# EAGLE board m2201-stereo-input (EAGLE 7.5.0)
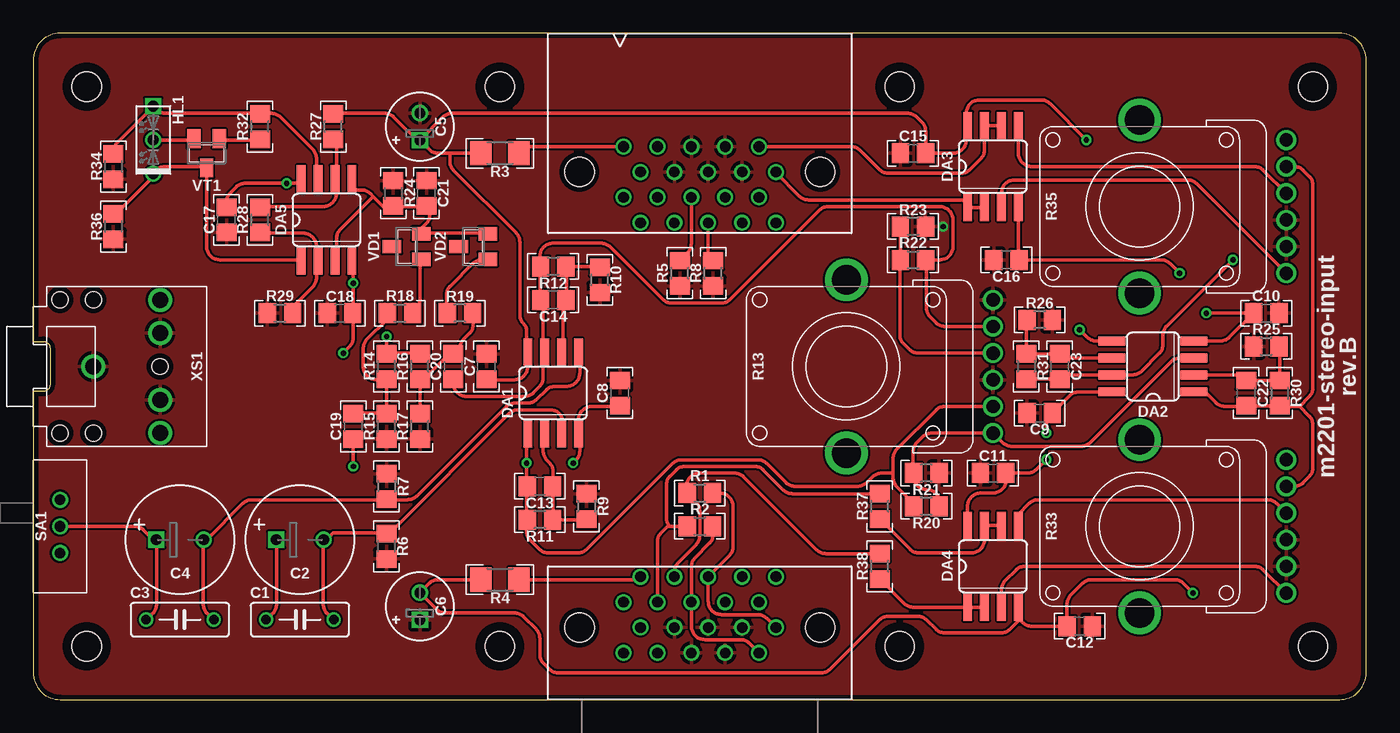
[diagram p0: board, top side]
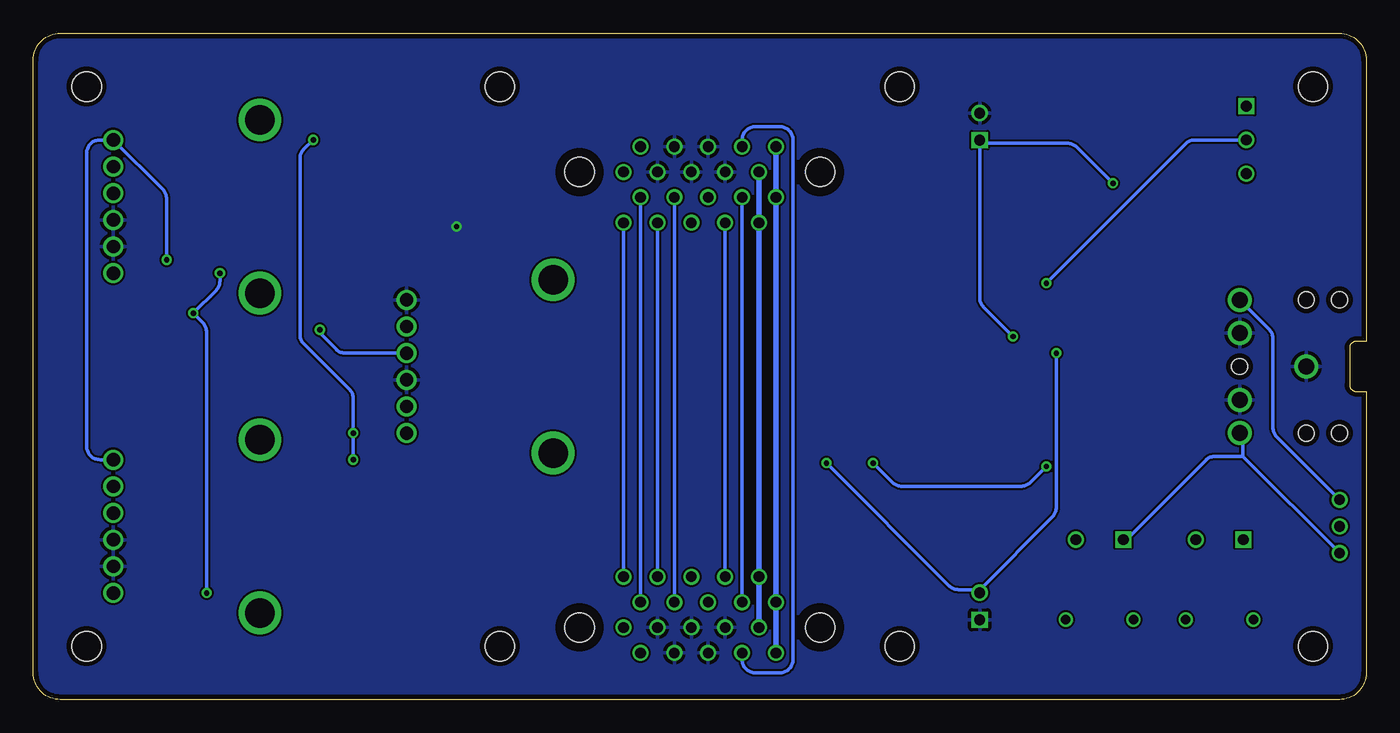
[diagram p1: board, bottom side, seen from below]

Size 100 x 50 mm. Coordinates in mm from the lower left corner, seen from the top.
Outline: 0,48 0,26.88 0.75,26.88 arc-90 1.25,26.38 1.25,23.62 arc-90 0.75,23.12 0,23.12 0,2 arc90 2,0 98,0 arc90 100,2 100,48 arc90 98,50 2,50 arc90 0,48
Copper layers (1*16): Top 0.0356mm / dielectric 1.5011mm / Bottom 0.0356mm
Design rules "LaenPCBOrder": minimum track width 6mil, minimum drill 13mil, track to track 6mil, track to pad 6mil, pad to pad 6mil, via to via 6mil, smd to smd 6mil, copper to edge 15mil, drill to drill 6mil, minimum pad ring 7mil, minimum via ring 7mil, stop-mask expansion 3mil, vias tented up to drill 0mil, thermal gap 10mil

## Footprints (pad centres in the part's own frame; a part is rotated, then mirrored left to right if it is on the bottom)
C050-025X075 = drill 0.7: 1 -2.54,0; 2 2.54,0
E3,5-8 = drill 0.813 square: + -1.778,0 | drill 0.813: - 1.778,0
E2-5 = drill 0.813 square: + -1.016,0 | drill 0.813: - 1.016,0
C-0805 = smd 1.3 x 1.5: 1 -0.95,0; 2 0.95,0
SO-8 = smd 0.66 x 2.032: 1 -1.905,-3.073; 2 -0.635,-3.073; 3 0.635,-3.073; 4 1.905,-3.073; 5 1.905,3.073; 6 0.635,3.073; 7 -0.635,3.073; 8 -1.905,3.073
LED2X5-3PIN = drill 0.813 square: A1 -2.54,0 | drill 0.813: A2 2.54,0; K 0,0
ST2-BOARD-50 = drill 0.8: A+15 44.285,7.31; A+15' 44.285,37.69; A-15 45.555,9.215; A-15' 45.555,35.785; ACV1 51.905,7.31; ACV1' 51.905,37.69; ACV2 53.175,9.215; ACV2' 53.175,35.785; ALFBK 49.365,7.31; ALFBK' 49.365,37.69; ALMIX 46.825,7.31; ALMIX' 46.825,37.69; ARFBK 50.635,9.215; ARFBK' 50.635,35.785; ARMIX 48.095,9.215; ARMIX' 48.095,35.785; ASMBCLK 55.715,9.215; ASMBCLK' 55.715,35.785; ASMBDAT 54.445,7.31; ASMBDAT' 54.445,37.69; B4 48.095,5.405; B4' 48.095,39.595; B5 49.365,3.5; B5' 49.365,41.5; B6 50.635,5.405; B6' 50.635,39.595; B7 51.905,3.5; B7' 51.905,41.5; B8 53.175,5.405; B8' 53.175,39.595; B+15 44.285,3.5; B+15' 44.285,41.5; B-15 45.555,5.405; B-15' 45.555,39.595; BINL 54.445,3.5; BINR 55.715,5.405; BOUTL' 54.445,41.5; BOUTR' 55.715,39.595; BSENSE 46.825,3.5; BSENSE' 46.825,41.5 | hole 2.2: 4,4; 4,46; 96,4; 96,46; 35,46; 65,46; 65,4; 35,4; 59.025,5.405; 40.975,5.405; 40.975,39.595; 59.025,39.595
R-0805 = smd 1.3 x 1.5: 1 -0.95,0; 2 0.95,0
R-1206 = smd 1.6 x 1.803: 1 -1.422,0; 2 1.422,0
RV11-DUAL = drill 1: 1 -1,-11; 1' -3,-11; 2 1,-11; 2' -5,-11; 3 3,-11; 3' 5,-11 | drill 2.2: S1 -6.5,0; S2 6.5,0
APEM-MJS12R = drill 0.8: C 0,-2; NC 2,-2; NO -2,-2
SOT23 = smd 1 x 1.4: 1 -0.95,-1.1; 2 0.95,-1.1; 3 0,1.1
35RAP = drill 1.2: 1 4.5,0; 2 9.5,-5; 3 9.5,5; 10 9.5,-2.5; 11 9.5,2.5 | hole 1.2: 2,5; 2,-5; 4.5,5; 4.5,-5; 9.5,0

## Placement (x,y rotation side)
C1  100N(FILM)  [C050-025X075]  20,6 0 top
C2  47U/35V  [E3,5-8]  20,12 0 top
C3  100N(FILM)  [C050-025X075]  11,6 0 top
C4  47U/35V  [E3,5-8]  11,12 0 top
C5  10U/35V  [E2-5]  29,43 90 top
C6  10U/35V  [E2-5]  29,7 90 top
C7  100N  [C-0805]  34,25 270 top
C8  100N  [C-0805]  44,23 90 top
C9  100N  [C-0805]  75.5,21.5 0 top
C10  100N  [C-0805]  92.5,29 0 top
C11  100N  [C-0805]  72,17 0 top
C12  100N  [C-0805]  78.5,5.5 0 top
C13  22P  [C-0805]  38,16 180 top
C14  22P  [C-0805]  39,30 180 top
C15  100N  [C-0805]  66,41 0 top
C16  100N  [C-0805]  73,33 180 top
C17  100N  [C-0805]  14.5,36 90 top
C18  100N  [C-0805]  23,29 180 top
C19  100N  [C-0805]  24,20.5 90 top
C20  100N  [C-0805]  31.5,25 90 top
C21  100N  [C-0805]  29.5,38 270 top
C22  22P  [C-0805]  91,23 270 top
C23  22P  [C-0805]  77,25 270 top
DA1  NJM2068M  [SO-8]  39,23 0 top
DA2  NJM2068M  [SO-8]  84,25 90 top
DA3  NJM5532M  [SO-8]  72,40 0 top
DA4  NJM5532M  [SO-8]  72,10 0 top
DA5  LM2903M  [SO-8]  22,36 0 top
HL1  RED/BLUE(2MMX5MM,CC)  [LED2X5-3PIN]  9,42 270 top
O1  [EMPTY]  -39.37,99.06 0 top  (outside the outline)
O2  450-AA150(15MM,D,BLACK)  [EMPTY]  -41.91,99.06 0 top  (outside the outline)
O3  450-CP155(15MM,GRAY/WHITE)  [EMPTY]  -54.61,99.06 0 top  (outside the outline)
O4  450-AA150(15MM,D,BLACK)  [EMPTY]  -44.45,99.06 0 top  (outside the outline)
O5  450-CP156(15MM,BLACK/WHITE)  [EMPTY]  -49.53,99.06 0 top  (outside the outline)
O6  450-AA150(15MM,D,BLACK)  [EMPTY]  -46.99,99.06 0 top  (outside the outline)
O7  450-CP156(15MM,BLACK/WHITE)  [EMPTY]  -52.07,99.06 0 top  (outside the outline)
PCB1  rev.B  [ST2-BOARD-50]  0,0 0 top
R1  10K  [R-0805]  50,15.5 0 top
R2  10K  [R-0805]  50,13 0 top
R3  10R(1206)  [R-1206]  35,41 180 top
R4  10R(1206)  [R-1206]  35,9 180 top
R5  100K  [R-0805]  48.5,32 90 top
R6  100K  [R-0805]  26.5,11.5 90 top
R7  100K  [R-0805]  26.5,16 270 top
R8  100K  [R-0805]  51,32 90 top
R9  10K  [R-0805]  41.5,14.5 270 top
R10  10K  [R-0805]  42.5,31.5 90 top
R11  10K  [R-0805]  38,13.5 180 top
R12  10K  [R-0805]  39,32.5 180 top
R13  2*B20K(CD)  [RV11-DUAL]  61,25 90 top
R14  10M  [R-0805]  26.5,25 90 top
R15  100K  [R-0805]  26.5,20.5 90 top
R16  10M  [R-0805]  29,25 90 top
R17  100K  [R-0805]  29,20.5 90 top
R18  47K  [R-0805]  27.5,29 0 top
R19  47K  [R-0805]  32,29 180 top
R20  9K1  [R-0805]  67,14.5 180 top
R21  9K1  [R-0805]  67,17 180 top
R22  9K1  [R-0805]  66,33 0 top
R23  9K1  [R-0805]  66,35.5 180 top
R24  330K  [R-0805]  27,38 270 top
R25  10K  [R-0805]  92.5,26.5 0 top
R26  10K  [R-0805]  75.5,28.5 180 top
R27  22K  [R-0805]  22.5,43 90 top
R28  4K7  [R-0805]  17,36 90 top
R29  100R  [R-0805]  18.5,29 0 top
R30  33K  [R-0805]  93.5,23 270 top
R31  33K  [R-0805]  74.5,25 270 top
R32  10K  [R-0805]  17,43 90 top
R33  2*A10K  [RV11-DUAL]  83,13 90 top
R34  2K2  [R-0805]  6,40 270 top
R35  2*A10K  [RV11-DUAL]  83,37 90 top
R36  1K8  [R-0805]  6,35.5 270 top
R37  10K  [R-0805]  63.5,14.5 90 top
R38  10K  [R-0805]  63.5,10 90 top
SA1  MJS12R  [APEM-MJS12R]  0,13 90 top
U1  FX2-20P-1.27DS  [EMPTY]  -60,-7 0 top  (outside the outline)
U2  FX2-20S-1.27DS  [EMPTY]  -61,-9 0 top  (outside the outline)
U3  ERM1-5MM  [EMPTY]  -57.15,99.06 0 top  (outside the outline)
VD1  BAS16  [SOT23]  28,34 90 top
VD2  BAS16  [SOT23]  33,34 90 top
VT1  BC848  [SOT23]  13,41 180 top
XS1  35RAPC4BHN2  [35RAP]  0,25 0 top

## Library data of the parts
C1 C3 = capacitors; MOUSER: 505-MKS2.1/63/5
C2 C4 = capacitors-electrolytic; MOUSER: 647-USP1E470MDD
C5 C6 = capacitors-electrolytic; MOUSER: 647-USW1V100MDD
C7-C12 C15-C21 = capacitors; MOUSER: 77-VJ0805V104MXBPBC
C13 C14 C22 C23 = capacitors; MOUSER: 77-VJ0805A220GXACBC
DA1 DA2 = ic-jrc; MOUSER: 513-NJM2068M
DA3 DA4 = ic-jrc; MOUSER: 513-NJM5532M
DA5 = ic-fairchild; MOUSER: 512-LM2903M
HL1 = optoelectronics
O1 = text
O2 O4 O6 = hardware; MOUSER: 450-AA150
O3 = hardware; MOUSER: 450-CP155
O5 O7 = hardware; MOUSER: 450-CP156
PCB1 = module-footprints
R1 R2 R9-R12 R25 R26 R32 R37 R38 = resistors; MOUSER: 660-RK73H2ATTD1002F
R3 R4 = resistors; MOUSER: 660-RK73H2BTTD10R0F
R5-R8 R15 R17 = resistors; MOUSER: 660-RK73H2ATTD1003F
R13 = potentiometers; MOUSER: 688-RK12L1230C1M
R14 R16 = resistors; MOUSER: 660-RK73H2ATTD1005F
R18 R19 = resistors; MOUSER: 660-RK73H2ATTD4702F
R20-R23 = resistors; MOUSER: 660-RK73H2ATTD9101F
R24 = resistors; MOUSER: 660-RK73H2ATTD3303F
R27 = resistors; MOUSER: 660-RK73H2ATTD2202F
R28 = resistors; MOUSER: 660-RK73H2ATTD4701F
R29 = resistors; MOUSER: 660-RK73H2ATTD1000F
R30 R31 = resistors; MOUSER: 660-RK73H2ATTD3302F
R33 R35 = potentiometers; MOUSER: 688-RK12L12C0A0E
R34 = resistors; MOUSER: 660-RK73H2ATTD2201F
R36 = resistors; MOUSER: 660-RK73H2ATTD1801F
SA1 = switches; MOUSER: 642-MJS12R
U1 = hardware; MOUSER: 798-FX2-20P-1.27DS71
U2 = hardware; MOUSER: 798-FX2-20S-1.27DS71
U3 = hardware
VD1 VD2 = diodes; MOUSER: 863-BAS16LT3G
VT1 = transistors-npn; MOUSER: 863-BC848BLT3G
XS1 = connectors; MOUSER: 502-35RAPC4BHN2

## Nets
+15V [power]: C5.+ C7.2 C9.2 C11.2 C15.2 C17.2 DA1.8 DA2.8 DA3.8 DA4.8 DA5.8 R3.2 R14.2 R16.2 R27.2
-15V: C6.- C8.1 C10.1 C12.1 C16.1 C18.1 DA1.4 DA2.4 DA3.4 DA4.4 DA5.4 HL1.K R4.2 VT1.2
GND: C5.- C6.+ C7.1 C8.2 C9.1 C10.2 C11.1 C12.2 C15.1 C16.2 C17.1 C18.2 C21.1 PCB1.B4 PCB1.B4' PCB1.B5 PCB1.B5' PCB1.B6 PCB1.B6' PCB1.B7 PCB1.B7' PCB1.B8 PCB1.B8' R5.1 R6.1 R7.1 R8.1 R9.1 R10.1 R13.1 R13.3' R15.1 R17.1 R21.1 R23.1 R24.1 R25.1 R26.1 R29.1 R33.1 R33.1' R34.2 R35.1 R35.1' R36.2 XS1.1 XS1.10 XS1.11
LMIX: PCB1.ALMIX PCB1.ALMIX' R2.1 R37.2
N$1: PCB1.A+15 PCB1.A+15' PCB1.B+15 PCB1.B+15' R3.1
N$2: PCB1.ARFBK' R8.2
N$3: DA2.3 R13.2' R20.1 R21.2
N$4: PCB1.ALFBK' R5.2
N$5: PCB1.A-15 PCB1.A-15' PCB1.B-15 PCB1.B-15' R4.1
N$6: SA1.NC XS1.3
N$7: C1.1 C2.+ SA1.NO XS1.2
N$8: DA2.5 R13.2 R22.1 R23.2
N$9: C3.2 C4.- DA1.5 R7.2
N$10: C1.2 C2.- DA1.3 R6.2
N$11: C23.2 DA2.7 R31.2 R33.3' R35.3'
N$12: C22.2 DA2.1 R30.2 R33.3 R35.3
N$13: C22.1 DA2.2 R25.2 R30.1
N$14: C23.1 DA2.6 R26.2 R31.1
N$15: C14.2 C20.1 DA1.7 R12.2 R13.3 R22.2
N$16: PCB1.BSENSE PCB1.BSENSE'
N$17: C19.2 R14.1 R15.2 R18.1
N$18: DA3.6 DA3.7 PCB1.BOUTL'
N$19: C13.2 C19.1 DA1.1 R11.2 R13.1' R20.2
N$20: DA4.6 DA4.7 R37.1
N$21: DA3.1 DA3.2 PCB1.BOUTR'
N$22: DA4.1 DA4.2 R38.1
N$23: DA3.5 R35.2
N$24: DA4.5 R33.2
N$25: DA3.3 R35.2'
N$26: C13.1 DA1.2 R9.2 R11.1
N$27: C14.1 DA1.6 R10.2 R12.1
N$28: DA4.3 R33.2'
N$29: R18.2 VD1.1
N$31: C20.2 R16.1 R17.2 R19.1
N$36: C3.1 C4.+ SA1.C
N$38: PCB1.ASMBDAT PCB1.ASMBDAT'
N$39: PCB1.ARFBK PCB1.BINR R1.2
N$40: PCB1.ALFBK PCB1.BINL R2.2
N$41: PCB1.ACV1 PCB1.ACV1'
N$42: PCB1.ACV2 PCB1.ACV2'
N$43: PCB1.ASMBCLK PCB1.ASMBCLK'
N$44: R19.2 VD2.1
N$45: C21.2 DA5.3 DA5.5 R24.2 VD1.2 VD2.2
N$46: DA5.2 R28.1 R29.2
N$47: DA5.6 R27.1 R28.2
N$48: DA5.7 HL1.A1 R32.2 R34.1
N$49: R32.1 VT1.1
N$51: DA5.1 HL1.A2 R36.1 VT1.3
RMIX: PCB1.ARMIX PCB1.ARMIX' R1.1 R38.2

## Tracks (layer width: path | path; a pad name or v marks a point on that pad's centre or on a via)
+15V  (via drill 0.4)
  Top 0.254: C7.2 34.05,24 36.09,24 arc90 37.09,25 DA1.8 37,26.25 37,27.71 arc45 36.79,28.21 arc-45 36.5,28.91 36.5,34.34 arc45 36.21,35.04 31.54,39.71 arc-45 31.25,40.41 31.25,41 | DA4.8 70.09,14.5 arc-90 71.09,15.5 72,15.5 arc90 73,16.5 73,16.95 C11.2 74.59,17 arc45 75.29,17.29 v76,18 | DA2.8 78.46,23.09 arc45 77.75,22.8 C9.2 76,21.05 v76,20 | R3.2 31.25,41 | 31.25,41 30.4,41 arc-45 29.69,41.29 C5.+ | v79,42 76.29,44.71 arc45 75.59,45 71,45 arc90 70,44 70,43.17 DA3.8 70,42.98 70,42 arc-90 69,41 C15.2 66.95,42.64 arc45 66.66,43.34 66.29,43.71 arc45 65.59,44 31.43,44 arc45 30.72,43.71 C5.+ | DA5.8 20.25,39 20,38.75 v19,38.75 15.91,38.75 arc45 15.21,38.46 14.79,38.04 arc45 14.5,37.34 C17.2 14.5,36.75 | R16.2 29,26 26.5,26 R14.2 26.5,25.75 26.25,26 26.5,26.25 v26.5,27.25 | R27.2 22.5,44 26.34,44 arc-45 27.04,43.71 29,41.75 C5.+
  Bottom 0.254: v76,18 v76,20 76,22.59 arc-45 76.29,23.29 79.71,26.71 arc45 80,27.41 80,40.59 arc45 79.71,41.29 v79,42 | v19,38.75 21.71,41.46 arc-45 22.41,41.75 29,41.75 | v26.5,27.25 28.71,29.46 arc45 29,30.16 29,41.75 | 29,41.75 C5.+
-15V  (via drill 0.4)
  Top 0.254: C8.1 43.95,22 41.91,22 arc90 40.91,21 DA1.4 41,19.75 41,18.66 arc-45 40.71,17.96 v40.5,17.75 | DA2.4 89.04,26.91 arc45 89.75,27.2 C10.1 v88,29 | DA3.4 73.91,33.05 C16.1 84.59,33 arc-45 85.29,32.71 v86,32 | R4.2 30.4,9 arc45 29.69,8.71 C6.- 30.22,6.79 arc45 30.93,6.5 36.09,6.5 arc-45 36.79,6.21 37.71,5.29 arc-45 38,4.59 38,3.41 arc45 38.29,2.71 38.71,2.29 arc45 39.41,2 59.09,2 arc45 59.79,2.29 63.46,5.96 arc-45 64.16,6.25 66.34,6.25 arc-45 67.04,5.96 67.71,5.29 arc45 68.41,5 72.59,5 arc45 73.29,5.29 73.91,5.91 DA4.4 73.91,6.5 arc90 74.91,5.5 C12.1 77.55,7.14 arc-45 77.84,7.84 78.71,8.71 arc-45 79.41,9 85.59,9 arc-45 86.29,8.71 v87,8 | HL1.K 11.75,42 12,41.75 12.25,42 VT1.2 | 24,29 v24,31.25 24,32.75 DA5.4 | 24,29 24,27.16 arc-45 23.71,26.46 v23.25,26 | 24,29 C18.1
  Bottom 0.254: v87,8 87,27.59 arc-45 87.29,28.29 v88,29 86.29,30.71 arc-45 86,31.41 v86,32 | v24,31.25 13.54,41.71 arc45 12.84,42 HL1.K | 29,8.25 23.54,13.71 arc-45 23.25,14.41 v23.25,26 | v40.5,17.75 31.29,8.54 arc-45 30.59,8.25 29,8.25 | 29,8.25 C6.-
GND  (via drill 0.4)
  Top 0.254: 67.25,35.5 67,35.75 66.75,35.5 R23.1 | 72,32.75 72.25,33 C16.2
  other vias: 68.25,35.5
  pour Bottom: 0,50 100,50 100,0 0,0
  pour Top: 0,50 100,50 100,0 0,0
LMIX
  Top 0.254: R2.1 47.75,13 | 47.75,13 47.58,13 47.12,12.54 arc45 46.83,11.84 PCB1.ALMIX | R37.2 56.96,15.45 arc-45 56.26,15.74 54.79,17.21 arc45 54.09,17.5 48.91,17.5 arc45 48.21,17.21 47.79,16.79 arc45 47.5,16.09 47.5,13.6 arc45 47.75,13
  Bottom 0.254: PCB1.ALMIX PCB1.ALMIX'
N$1
  Top 0.254: PCB1.B+15' 37.34,41.5 arc45 36.63,41.21 R3.1
  Bottom 0.406: PCB1.B+15' PCB1.A+15' PCB1.A+15 PCB1.B+15
N$2
  Top 0.254: PCB1.ARFBK' 50.63,33.31 R8.2
N$3
  Top 0.254: DA2.3 86.05,25.64 arc45 85.34,25.34 79.29,19.29 arc-45 78.59,19 73.41,19 arc-45 72.71,19.29 R13.2' 67.41,20 arc45 66.71,19.71 66.29,19.29 arc45 66,18.59 66,17.05 R21.2 66.05,16.75 arc90 67.05,15.75 arc-90 68,14.8 68,14.55 R20.1
N$4
  Top 0.254: PCB1.ALFBK' 49.37,34.23 arc-45 49.07,33.52 R5.2
N$5
  Top 0.254: R4.1 45.04,9 arc45 PCB1.A-15
  Bottom 0.406: PCB1.B-15 PCB1.A-15 PCB1.A-15' PCB1.B-15'
N$6
  Bottom 0.254: SA1.NC 6.71,19.71 arc45 7,20.41 7,27.09 arc-45 7.29,27.79 XS1.3
N$7
  Top 0.254: C1.1 17.5,6 17.96,6.46 arc45 18.25,7.16 18.25,12 C2.+
  Bottom 0.254: XS1.2 9.25,19.75 9.25,18.25 | SA1.NO 9.25,18.25 | 9.25,18.25 11.34,18.25 arc-45 12.04,17.96 18,12 C2.+
N$8  (via drill 0.4)
  Top 0.254: R23.2 R22.1 65,32.95 65,27.41 arc45 65.29,26.71 65.71,26.29 arc45 66.41,26 R13.2 | DA2.5 79.76,26.91 arc-45 79.05,27.2 v78.5,27.75
  Bottom 0.254: v78.5,27.75 78.5,27.5 77.29,26.29 arc-45 76.59,26 R13.2
N$9
  Top 0.254: C3.2 13.5,6 13.04,6.46 arc-45 12.75,7.16 12.75,12 C4.- 13,12 15.71,14.71 arc-45 16.41,15 26.5,15 | DA1.5 41,26 41,24.5 arc-90 40,23.5 39.16,23.5 arc45 38.46,23.21 37.79,22.54 arc-45 37.09,22.25 36.16,22.25 arc45 35.46,21.96 28.79,15.29 arc-45 28.09,15 26.5,15 | 26.5,15 R7.2
N$10
  Top 0.254: C1.2 22.5,6 22.04,6.46 arc-45 21.75,7.16 21.75,12 C2.- 22,12 22.5,12.5 26.5,12.5 | DA1.3 39.75,20 39.75,20.75 arc90 38.75,21.75 36.41,21.75 arc45 35.71,21.46 26.75,12.5 26.5,12.5 | 26.5,12.5 R6.2
N$11  (via drill 0.4)
  Top 0.254: R31.2 C23.2 77.31,24.36 DA2.7 82.45,24.36 arc45 83.16,24.66 84.46,25.96 arc45 84.75,26.66 84.75,27.34 arc-45 85.04,28.04 v90,33
  Bottom 0.254: R33.3' 95,18 arc90 96,19 96,41 arc90 95,42 R35.3' 90.29,38.29 arc45 90,37.59 v90,33
N$12
  Top 0.254: DA2.1 87.49,23.09 arc-45 88.2,22.8 88.71,22.29 arc45 89.41,22 90.95,22 C22.2 R30.2 93.55,22 95,22 | R35.3 94.59,40 arc-45 95.29,39.71 95.71,39.29 arc-45 96,38.59 96,23.41 arc-45 95.71,22.71 95,22 | R33.3 94.59,16 arc45 95.29,16.29 95.71,16.71 arc45 96,17.41 96,20.59 arc45 95.71,21.29 95,22
N$13
  Top 0.254: DA2.2 90.58,24.36 C22.1 R30.1 93.5,26.45 R25.2
N$14
  Top 0.254: DA2.6 77.31,25.64 C23.1 R31.1 74.5,28.45 R26.2
N$15
  Top 0.254: R13.3 68.41,28 arc-45 67.71,28.29 67.29,28.71 arc-23 67.08,29.03 arc-23 67,29.41 67,32.95 R22.2 | 38,30 38,29.5 38.25,29.25 38.25,26.25 DA1.7 38.25,26 38.25,24.16 arc-45 37.96,23.46 37.54,23.04 arc-45 36.84,22.75 32.5,22.75 arc-90 31.5,23.75 C20.1 | 38,30 38,32.5 | 38,30 C14.2 | 38,32.5 38,33.25 arc-90 39,34.25 42.59,34.25 arc-45 43.29,33.96 47.21,30.04 arc45 47.91,29.75 51.59,29.75 arc45 52.29,30.04 58.96,36.71 arc-45 59.66,37 68,37 arc-90 69,36 69,34 arc-90 68,33 R22.2 | 67,33 R22.2 | 38,32.5 R12.2
N$16
  Bottom 0.254: PCB1.BSENSE' 46.83,42 arc90 45.83,43 44,43 arc90 43,42 43,3 arc90 44,2 45.83,2 arc90 46.83,3 PCB1.BSENSE
N$17
  Top 0.254: 26.5,24 25.75,24 arc-90 24.75,25 24.75,26.34 arc-45 25.04,27.04 26.5,28.5 26.5,29 R18.1 | 26.5,24 R14.1 | 26.5,21.5 26.5,24 | C19.2 24,21.5 26.5,21.5 | 26.5,21.5 R15.2
N$18
  Top 0.254: DA3.6 DA3.7 71.36,41.28 arc-45 71.07,40.57 70.29,39.79 arc-45 69.59,39.5 64.16,39.5 arc-45 63.46,39.79 62.04,41.21 arc45 61.34,41.5 PCB1.BOUTL'
N$19  (via drill 0.4)
  Top 0.254: R13.1' 68.41,22 arc45 67.71,21.71 64.79,18.79 arc45 64.5,18.09 64.5,17 | 64.5,17 64.5,16.66 arc45 64.79,15.96 66,14.75 66,14.5 R20.2 | 64.5,17 63.66,17 arc45 62.96,16.71 62.54,16.29 arc-45 61.84,16 57.16,16 arc-45 56.46,16.29 55.04,17.71 arc45 54.34,18 48.66,18 arc45 47.96,17.71 41.54,11.29 arc-45 40.84,11 38.66,11 arc-45 37.96,11.29 37.29,11.96 arc-45 37,12.66 37,13.5 | 37,13.5 R11.2 | 37,16 37,13.5 | 37,16 v37,17.75 37,19.75 DA1.1 | 37,16 C13.2 | v24,17.5 24,19.25 23.75,19.5 24,19.75 C19.1
  Bottom 0.254: v24,17.5 25.21,16.29 arc45 25.91,16 34.84,16 arc45 35.54,16.29 v37,17.75
N$20
  Top 0.254: DA4.6 DA4.7 71.36,12 arc-90 70.36,11 66.46,11 arc-45 65.76,11.29 R37.1
N$21
  Top 0.254: DA3.2 DA3.1 70.25,37 69.75,37.5 58.16,37.5 arc-45 57.46,37.79 55.75,39.5 PCB1.BOUTR'
N$22
  Top 0.254: R38.1 65.33,7.22 arc45 66.04,6.93 DA4.1 DA4.2
N$23
  Top 0.254: DA3.5 73.91,41 arc90 74.91,40 91.59,40 arc-45 92.29,39.71 R35.2
N$24
  Top 0.254: DA4.5 73.91,13.9 74.71,14.71 arc-45 75.41,15 92.59,15 arc-45 93.29,14.71 R33.2
N$25
  Top 0.254: DA3.3 72.64,38 arc-90 73.64,39 86.59,39 arc-45 87.29,38.71 R35.2'
N$26
  Top 0.254: 39,16 39,17.09 arc45 38.71,17.79 38.54,17.96 arc-45 38.25,18.66 38.25,19.75 DA1.2 | 39,16 C13.1 | 39,13.5 39,16 | 39,13.5 R11.1 | 39,13.5 41.5,13.5 R9.2
N$27
  Top 0.254: DA1.6 39.75,26.25 39.75,29.25 40,29.5 40,30 | 40,30 40,32.5 | 40,30 C14.1 | R10.2 42.5,32.5 40,32.5 | 40,32.5 R12.1
N$28
  Top 0.254: DA4.3 72.64,8.22 arc-45 72.93,8.93 73.71,9.71 arc-45 74.41,10 91.59,10 arc-45 92.29,9.71 R33.2'
N$29
  Top 0.254: R18.2 28.5,29 28.71,29.21 arc45 29,29.91 29,32.75 28.75,33 29,33.25 VD1.1
N$31
  Top 0.254: 29,24 29.25,24 31.25,26 31.5,26 C20.2 31.5,25.75 32,26.25 32,26.34 arc-45 32.29,27.04 32.71,27.46 arc45 33,28.16 33,29 R19.1 | 29,24 29,21.75 29.25,21.5 29,21.25 R17.2 | 29,24 R16.1
N$36
  Top 0.254: C3.1 8.5,6 8.96,6.46 arc45 9.25,7.16 9.25,12 C4.+ 9,12 8.29,12.71 arc45 7.59,13 SA1.C
N$38
  Bottom 0.254: PCB1.ASMBDAT PCB1.ASMBDAT'
N$39
  Top 0.254: R1.2 51.5,15.5 arc-90 52.5,14.5 52.5,11.49 arc-45 52.21,10.79 PCB1.ARFBK 50.63,7.38 arc90 51.63,6.38 54.33,6.38 arc-45 55.04,6.08 PCB1.BINR
N$40
  Top 0.254: 49.38,7.33 49.38,9.96 arc-45 49.67,10.67 50.71,11.71 arc45 51,12.41 51,12.95 R2.2 | 49.38,7.33 arc-45 PCB1.ALFBK | 49.38,7.33 49.38,5.5 arc90 50.38,4.5 53.03,4.5 arc-45 53.74,4.21 PCB1.BINL
N$41
  Bottom 0.254: PCB1.ACV1 PCB1.ACV1'
N$42
  Bottom 0.254: PCB1.ACV2 PCB1.ACV2'
N$43
  Bottom 0.254: PCB1.ASMBCLK PCB1.ASMBCLK'
N$44
  Top 0.254: R19.2 31,29 31,30.34 arc-45 31.29,31.04 32.96,32.71 arc-45 33.66,33 34,33 VD2.1
N$45
  Top 0.254: 25.5,37.75 25.29,37.96 arc45 24.59,38.25 24.25,38.25 24,38.5 24,39 DA5.5 | 25.5,37.75 26.25,37 27,37 | 27,37 29.5,37 C21.2 29.5,37.25 29.75,37 29.75,36.41 arc-45 29.46,35.71 28.75,35 29,34.75 VD1.2 29.25,35 34,35 VD2.2 | 27,37 R24.2 | 25.5,37.75 23.04,35.29 arc45 22.75,34.59 22.75,33 DA5.3
N$46
  Top 0.254: R28.1 17,35 20.25,35 arc-90 21.25,34 21.25,33 DA5.2 21.25,32.75 21.25,31.66 arc-45 20.96,30.96 19.5,29.5 19.5,29 R29.2
N$47
  Top 0.254: R28.2 17,37 21.75,37 arc90 22.75,38 22.75,39 DA5.6 22.75,39.25 22.75,42 22.5,42.25 R27.1
N$48
  Top 0.254: 9,44.5 6.29,41.79 arc45 6,41.09 R34.1 | 9,44.5 9.21,44.29 arc45 9.91,44 17,44 | 9,44.5 HL1.A1 | DA5.7 21.25,39.25 21.25,40.59 arc45 20.96,41.29 18.54,43.71 arc45 17.84,44 17,44 | 17,44 R32.2
N$49
  Top 0.254: VT1.1 13.75,42 14,41.75 14.25,42 17,42 R32.1
N$51
  Top 0.254: R36.1 6,36.5 6.25,36.5 8.85,39.1 arc45 HL1.A2 9,39.5 9.21,39.71 arc-45 9.91,40 13,40 VT1.3 13,34 arc90 14,33 19.75,33 20,33.25 20.25,33 DA5.1
RMIX
  Top 0.254: PCB1.ARMIX 48.09,9.59 arc-45 48.39,10.29 49.71,11.61 arc45 50,12.32 50,14.14 arc45 49.71,14.84 R1.1 49,15.55 49,16 arc-90 50,17 52.59,17 arc-45 53.29,16.71 58.76,11.24 arc45 59.46,10.95 R38.2
  Bottom 0.254: PCB1.ARMIX PCB1.ARMIX'